# Altium PCB PCBTEST.PcbDoc
Units mil, origin at the board's own origin, x right, y up, seen from the top; angles counter-clockwise.
Board outline 6000 x 4000 mil, 2 copper layers (Top Layer, Bottom Layer); 25 components, 21 nets, 76 pads, 0 vias.
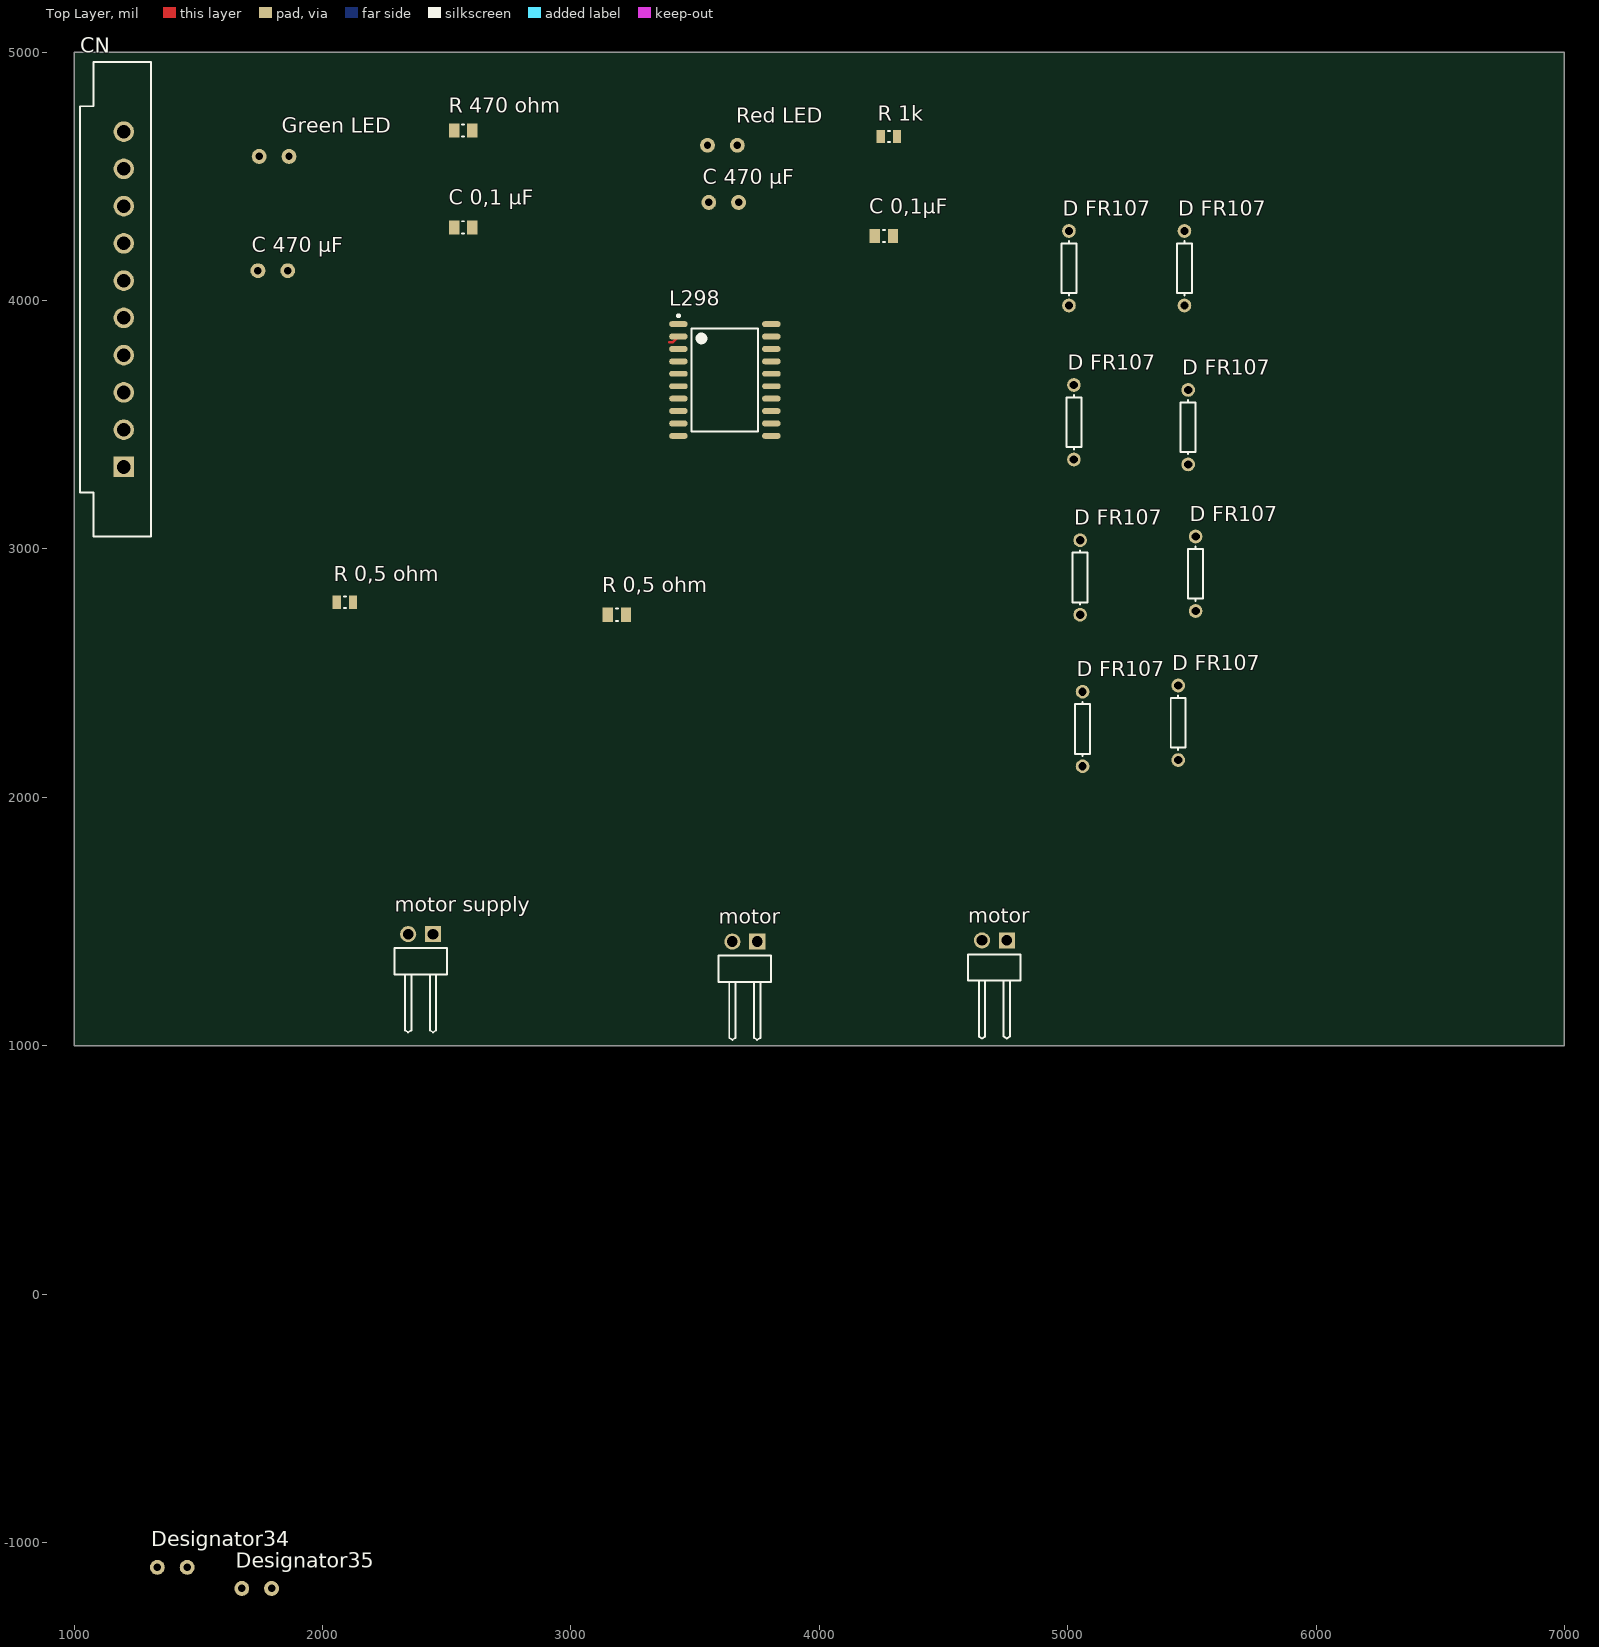
[diagram p0: Top Layer view]
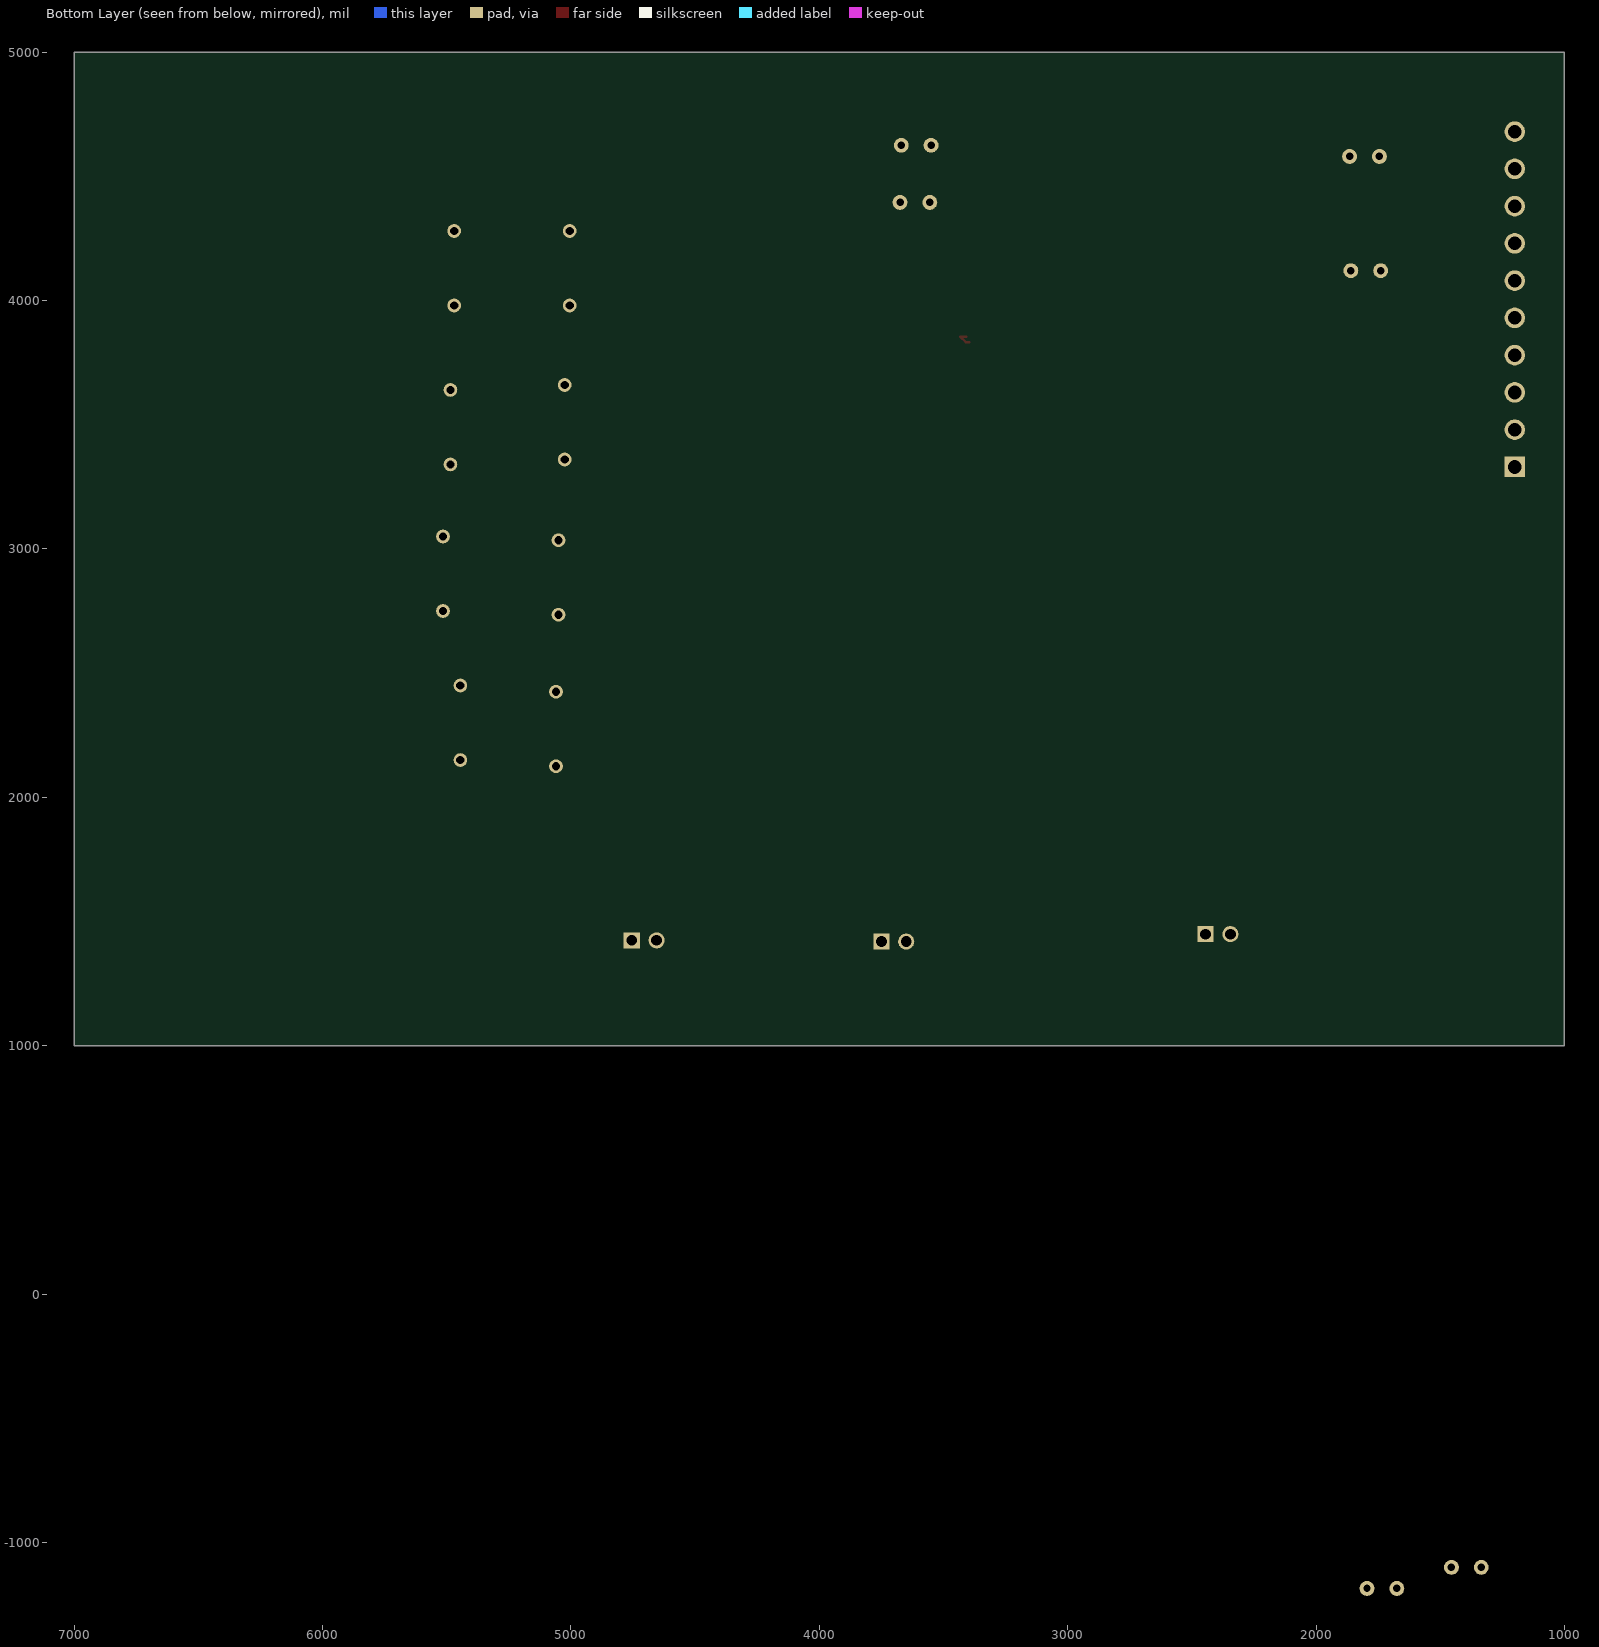
[diagram p1: Bottom Layer view, seen from below]

## Layer stack, top to bottom
Top Solder: solder mask 0.4, Solder Resist, Dk 3.5
Top Layer: signal copper 1.4
Dielectric 1: dielectric 12.6, FR-4, Dk 4.8
Bottom Layer: signal copper 1.4
Bottom Solder: solder mask 0.4, Solder Resist, Dk 3.5

## Board outline
1000,1000 7000,1000 7000,5000 1000,5000

## Design rules (kind name [scope] priority, off if disabled: settings)
Clearance [All] p1: gap=10 ignorepadtopadclearanceinfootprint=FALSE except(0: Arc-Hole Track-Hole SMDPad-Hole THPad-Hole Via-Hole Fill-Hole Poly-Hole Region-Hole Text-Hole)
PolygonConnect [All] p1: connectstyle=Relief reliefconductorwidth=10 reliefentries=4 polygonreliefangle="90 Angle" airgapwidth=10
RoomDefinition Sheet1 [InComponentClass('Sheet1')] p1: confinementstyle=ConfineIn formatcopy=TRUE lockcomponents=FALSE outline 7621.57,1236.81 13446.57,1236.81 13446.57,5366.81 7621.57,5366.81
RoomDefinition Schematic_H_Bridge [InComponentClass('Schematic_H_Bridge')] p2: confinementstyle=ConfineIn formatcopy=TRUE lockcomponents=FALSE outline 7535,1110 13380,1110 13380,5240 7535,5240
RoutingVias [All] p1: holewidth=28 width=50 viastyle="Through Hole" minholewidth=28 minwidth=50 maxholewidth=28 maxwidth=50
SolderMaskExpansion [All] p1: expansion=4 istentingtop=FALSE
Width [All] p1: maxlimit=10 minlimit=10 preferedwidth=10
30 further rules are at their usual default settings.

## Components (designator, comment, footprint, x,y, rotation, side; value= is the part's Value field where it differs from the comment)
"C 0,1 µF" "CRCW08051K00FKEA" RESC2013X50X30NL20T20 2566.32,4294.52 r0 top (schematic designator R2)
"C 0,1µF" "CRCW08051K00FKEA" RESC2013X50X30NL20T20 4260,4260 r0 top (schematic designator R?)
"C 470 µF" "Comment" "2pin header" 3695,4395 r0 top
"C 470 µF" "Comment" "2pin header" 1880,4120 r0 top
CN "Control inputs" 691701320010B 1166.54,4005 r90 top (schematic designator P?)
"D FR107" "0.5 Ohm 3W" AXIAL-0.3 5025,3510 r90 top value=1K (schematic designator R3)
"D FR107" "0.5 Ohm 3W" AXIAL-0.3 5005,4130 r90 top value=1K (schematic designator R3)
"D FR107" "0.5 Ohm 3W" AXIAL-0.3 5445,2300 r90 top value=1K (schematic designator R3)
"D FR107" "0.5 Ohm 3W" AXIAL-0.3 5060,2275 r90 top value=1K (schematic designator R3)
"D FR107" "0.5 Ohm 3W" AXIAL-0.3 5050,2885 r90 top value=1K (schematic designator R3)
"D FR107" "0.5 Ohm 3W" AXIAL-0.3 5485,3490 r90 top value=1K (schematic designator R3)
"D FR107" "0.5 Ohm 3W" AXIAL-0.3 5470,4130 r90 top value=1K (schematic designator R4)
"D FR107" "0.5 Ohm 3W" AXIAL-0.3 5515,2900 r90 top value=1K (schematic designator R3)
Designator34 "Comment" "2pin header" 1475,-1100 r0 top
Designator35 "Comment" "2pin header" 1815,-1185 r0 top
"Green LED" "Comment" "2pin header" 1885,4580 r0 top
L298 "Comment" L298 3620,3680 r0 top
motor "Motor 1" 61300211021 3700,1310 r0 top (schematic designator P2)
motor "Motor supply" 61300211021 4705,1315 r0 top (schematic designator P1)
"motor supply" "Motor 2" 61300211021 2395,1340 r0 top (schematic designator P3)
"R 0,5 ohm" "CRCW08051K00FKEA" RESC2013X50X30NL20T20 3185,2735 r0 top (schematic designator R2)
"R 0,5 ohm" "CRCW0805470RFKEA" RESC2013X50X30LL20T20 2090,2785 r0 top (schematic designator R1)
"R 1k" "CRCW0805470RFKEA" RESC2013X50X30LL20T20 4280,4660 r0 top (schematic designator R?)
"R 470 ohm" "CRCW08051K00FKEA" RESC2013X50X30NL20T20 2566.32,4684.52 r0 top (schematic designator R2)
"Red LED" "Comment" "2pin header" 3690,4625 r0 top

## Footprints (in the part's own frame and the unit in brackets; to place one, negate y for a bottom-side part, rotate by r counter-clockwise, add the part's x,y. Pads: shape width x height; smd on the part's side, far side on the other; paste and mask are expansions set on the pad)
"2pin header" [mil]
  round 60 hole 30: 11(-140,0) 12(-20,0)
61300211021 [mm] "Pin Header, pitch 2.54 mm, THT, Angled, single row, 2p"
  rect 1.65x1.65 hole 1.1: 1(1.27,2.77)
  round 1.65 hole 1.1: 2(-1.27,2.77)
  silkscreen extent -2.69,-7.27 2.69,1.35, body extent -2.54,-7.27 2.54,3.09, height 2.58
691701320010B [mm] "THR - 3,81mm - PCB Vertical Flange - 10p"
  rect 2.1x2.1 hole 1.4: 1(-17.145,-0.85)
  round 2.1 hole 1.4: 2(-13.335,-0.85) 3(-9.525,-0.85) 4(-5.715,-0.85) 5(-1.905,-0.85) 6(1.905,-0.85) 7(5.715,-0.85) 8(9.525,-0.85) 9(13.335,-0.85) 10(17.145,-0.85)
  silkscreen extent -24.25,-3.65 24.25,3.65, body extent -24.25,-3.65 24.24,3.65, height 9.25
AXIAL-0.3 [mm] "Axial Device, Thru-Hole; 2 Leads; 0.3 in Pin Spacing"
  round 1.4 hole 0.85: 1(-3.81,0) 2(3.81,0)
  silkscreen extent -2.77,-0.76 2.77,0.76
L298 [mm] "SOP, 20-Leads, Body 10,30x7,50mm, Pitch 1,27mm, IPC Medium Density"
  oval 1.9x0.6 smd: 1(-4.75,5.715) 2(-4.75,4.445) 3(-4.75,3.175) 4(-4.75,1.905) 5(-4.75,0.635) 6(-4.75,-0.635) 7(-4.75,-1.905) 8(-4.75,-3.175) 9(-4.75,-4.445) 10(-4.75,-5.715) 11(4.75,-5.715) 12(4.75,-4.445) 13(4.75,-3.175) 14(4.75,-1.905) 15(4.75,-0.635) 16(4.75,0.635) 17(4.75,1.905) 18(4.75,3.175) 19(4.75,4.445) 20(4.75,5.715)
  silkscreen extent -4.87,-5.25 3.4,6.69, body extent -3.8,-5.25 3.8,5.25, height 2.65
RESC2013X50X30LL20T20 [mm] "Chip Resistor, 2-Leads, Body 2.00x1.25mm, IPC High Density"
  rect 0.85x1.35 smd: 1(-0.825,0) 2(0.825,0)
  silkscreen extent -0.1,-0.58 0.1,0.58, body extent -1.1,-0.72 1.1,0.72, height 0.5
RESC2013X50X30NL20T20 [mm] "Chip Resistor, 2-Leads, Body 2.00x1.25mm, IPC Medium Density"
  rect 1.05x1.45 smd: 1(-0.925,0) 2(0.925,0)
  silkscreen extent -0.1,-0.63 0.1,0.63, body extent -1.1,-0.72 1.1,0.72, height 0.5

## Part data
"C 0,1 µF" "C 0,1µF" "R 0,5 ohm" "R 470 ohm": library part CMP-2001-03595-1, Manufacturer="Vishay Dale", Part Number=CRCW08051K00FKEA
CN: library part CMP-1502-02000-1, "Serie 7013 B - 3.81mm Vertical PCB Header THR Type with Flanges WR-TBL, 10 pin", Manufacturer="Wurth Elektronik", Operating Temperature=-40to105degC, Package Reference=691701320010B, Datasheet URL=http://katalog.we-online.de/em/datasheet/6917013200xxB.pdf, Gender=Male, Manufacturer URL=http://www.we-online.de, Mounting Technology=SMT, Packaging=TapeandReelwithCap, Part Number=691701320010B, Pin Number=10, Pitch=3.81mm, Publisher=WurthElektronik
"D FR107" "D FR107" "D FR107" "D FR107" "D FR107" "D FR107" "D FR107" "D FR107": library part Res1, "Resistor", LatestRevisionDate=17-Jul-2002, LatestRevisionNote="Re-released for DXP Platform.", PackageDescription="Axial Device, Thru-Hole; 2 Leads; 0.3 in Pin Spacing", PackageReference=AXIAL-0.3, Published=8-Jun-2000, Publisher="Altium Limited"
motor motor "motor supply": library part CMP-1502-01059-1, "THT Angled Pin Header WR-PHD, Pitch 2.54 mm, Single Row, 2 pins", Contact Resistance=20mOhm, Manufacturer="Wurth Elektronik", Operating Temperature=-40to105degC, Package Reference=61300211021, Rated Current=3A, Withstanding Voltage=500VAC, Working Voltage=250VAC, Datasheet URL=https://katalog.we-online.de/em/datasheet/6130xx11021.pdf, Gender=Male, Manufacturer URL=http://www.we-online.de, Mounting Technology=THT, Orientation=Angled, Packaging=Bag, Part Number=61300211021, Pin Number=2, Pitch=2.54mm, Publisher=WurthElektronik, Row Number=Single
"R 0,5 ohm" "R 1k": library part CMP-2001-03932-1, Manufacturer="Vishay Dale", Part Number=CRCW0805470RFKEA

## Nets (pads, with @x,y where several pads share a name; then routed paths per layer and width w, separated by ;. In a path a pad name is that pad's centre, name@x,y a point inside that pad or via, vN(x,y) a via of type N, cw(c..) or ccw(c..) an arc to the next point about the centre after c; other vN are vias at no path point)
GND: 
NetC1_1: 
NetC3_1: 
NetC4_2: 
NetC?_1: 
NetC?_2: 
NetD2_1: 
NetD3_1: 
NetD6_1: 
NetD7_1: 
NetD?_1: 
NetDS1_1: 
NetDS10_1: 
NetDS?_1: 
NetP?_3: 
NetP?_4: 
NetP?_5: 
NetP?_6: 
NetP?_7: 
NetP?_8: 
NetP?_9: 
pads on no net: "C 0,1 µF.1" "C 0,1 µF.2" "C 0,1µF.1" "C 0,1µF.2" "C 470 µF.11" "C 470 µF.12" "D FR107.1" "D FR107.2" "Green LED.11" "Green LED.12" "motor supply.1" "motor supply.2" "R 0,5 ohm.1" "R 0,5 ohm.2" "R 1k.1" "R 1k.2" "R 470 ohm.1" "R 470 ohm.2" "Red LED.11" "Red LED.12" CN.1 CN.2 CN.3 CN.4 CN.5 CN.6 CN.7 CN.8 CN.9 CN.10 Designator34.11 Designator34.12 Designator35.11 Designator35.12 L298.1 L298.2 L298.3 L298.4 L298.5 L298.6 L298.7 L298.8 L298.9 L298.10 L298.11 L298.12 L298.13 L298.14 L298.15 L298.16 L298.17 L298.18 L298.19 L298.20 motor.1 motor.2
copper on no net: | length 71
  Top Layer w10: 3396.89,3832.41 3410.4,3832.41 3432.99,3855 3407.4,3855